# Altium PCB bluetooth_candle.PcbDoc
Units mil, origin at the board's own origin, x right, y up, seen from the top; angles counter-clockwise.
Board outline 1700 x 1700 mil, 2 copper layers (Top Layer, Bottom Layer); 29 components, 46 nets, 119 pads, 21 vias.
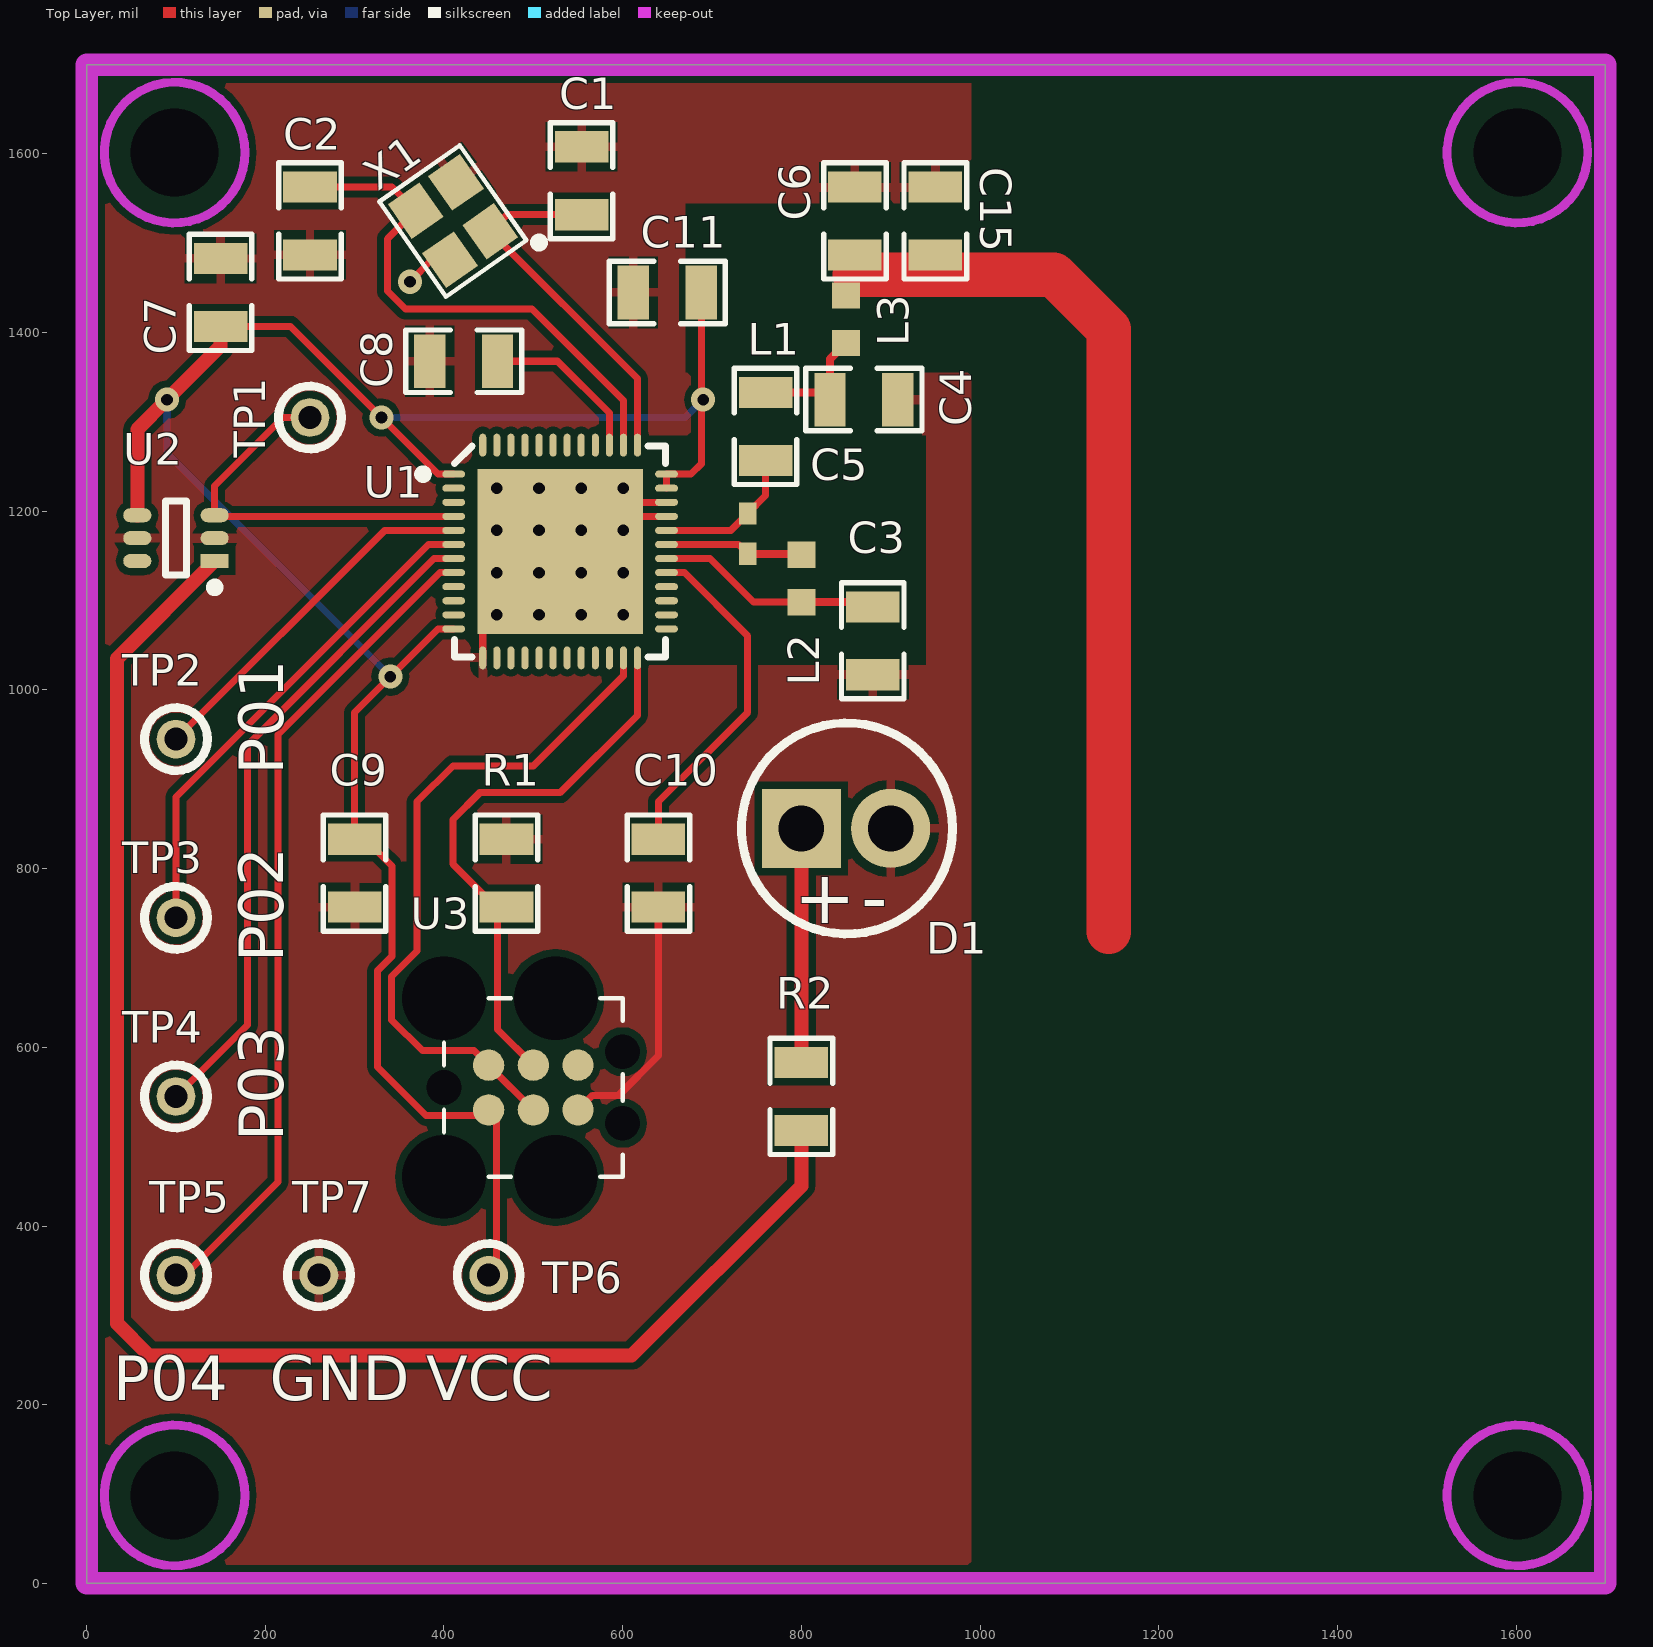
[diagram p0: Top Layer view]
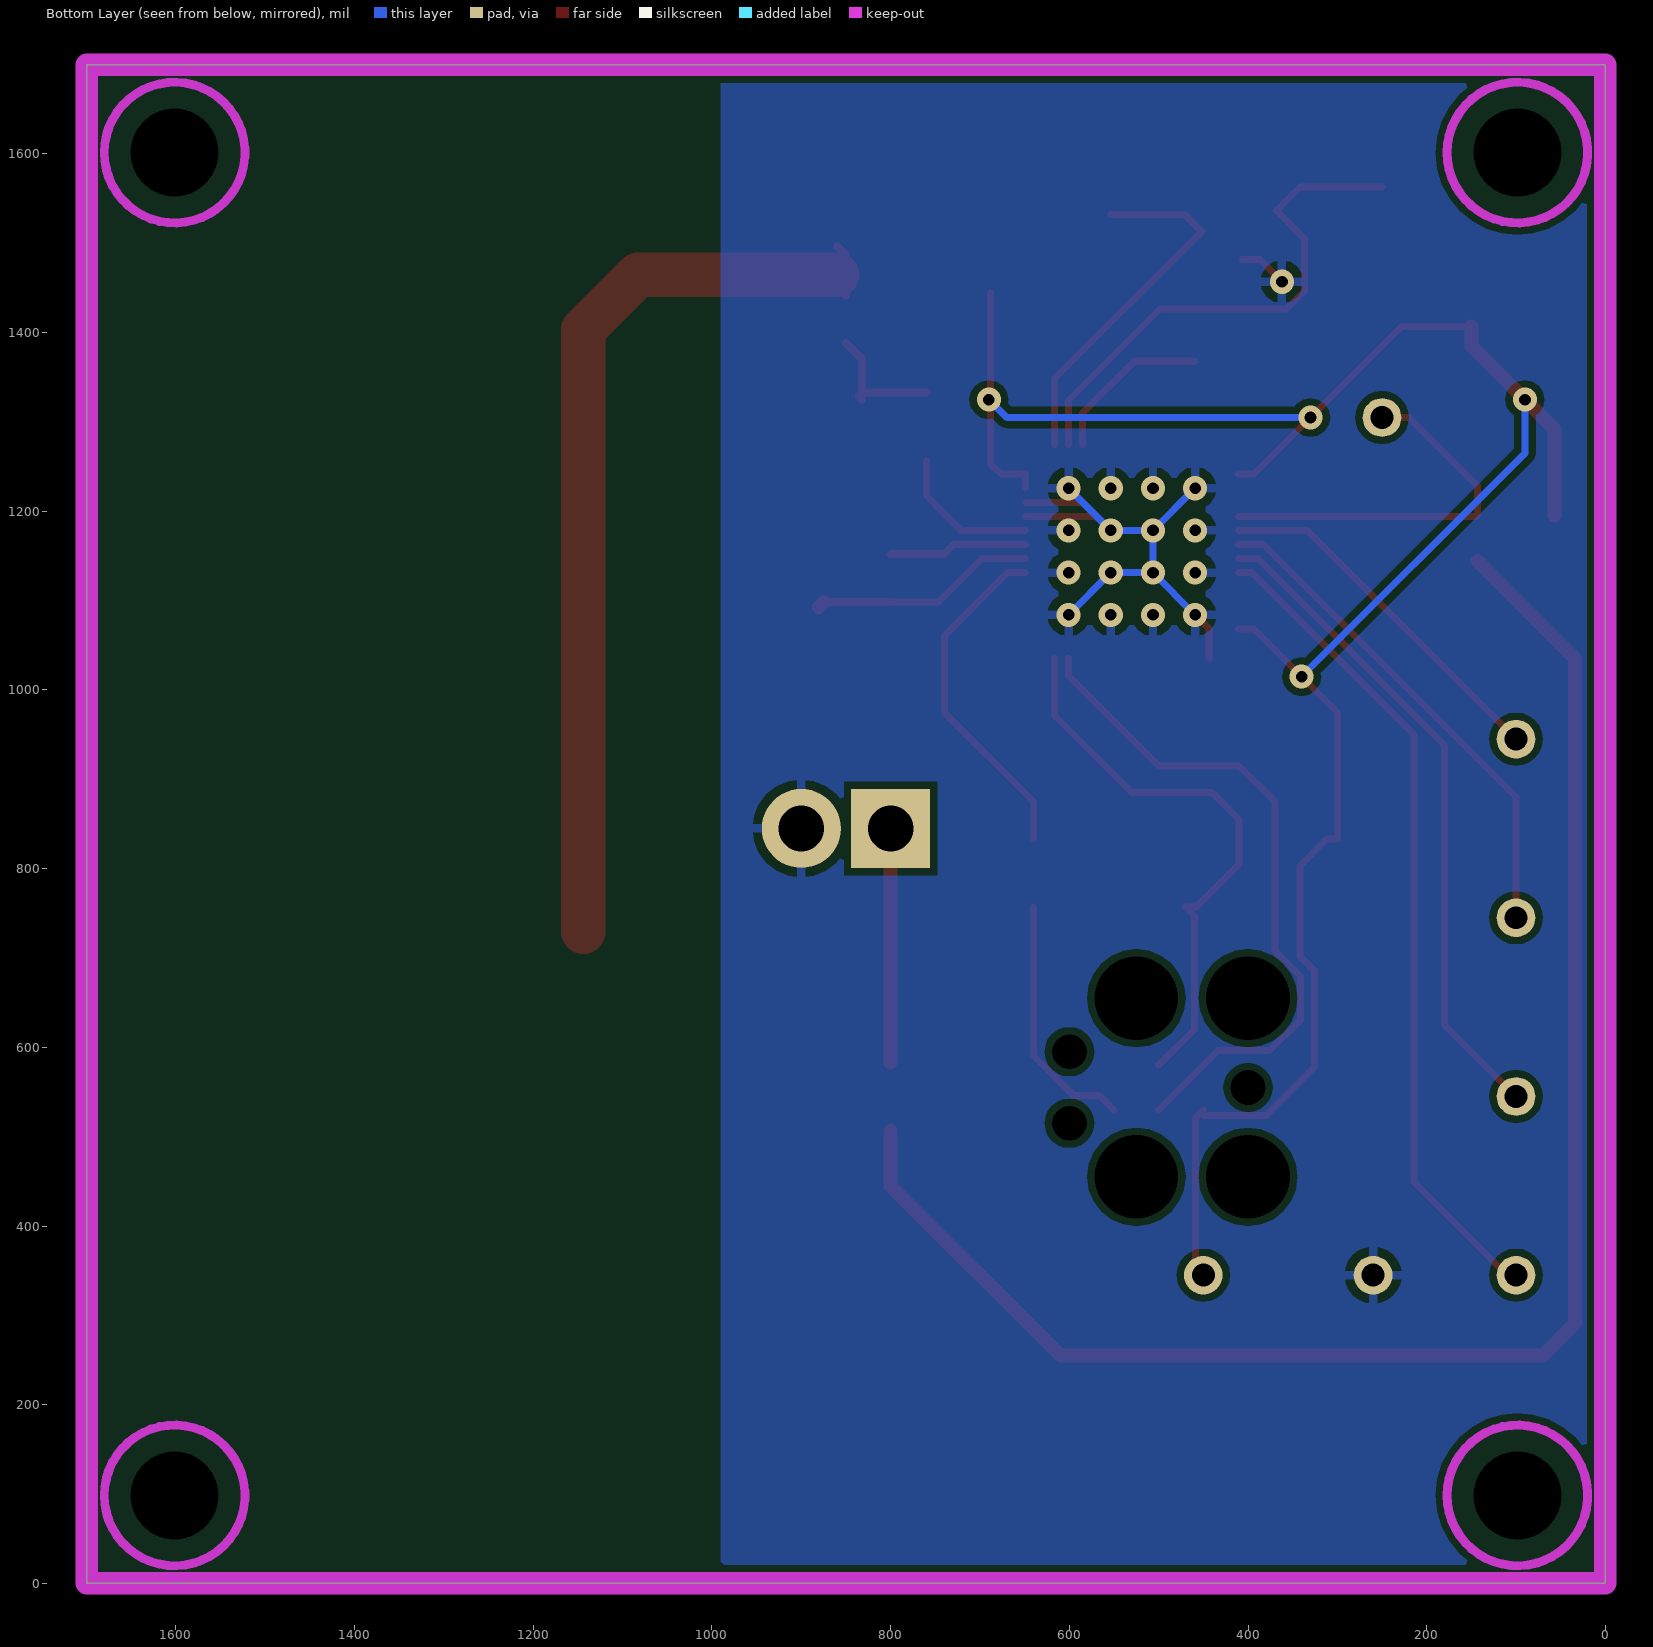
[diagram p1: Bottom Layer view, seen from below]
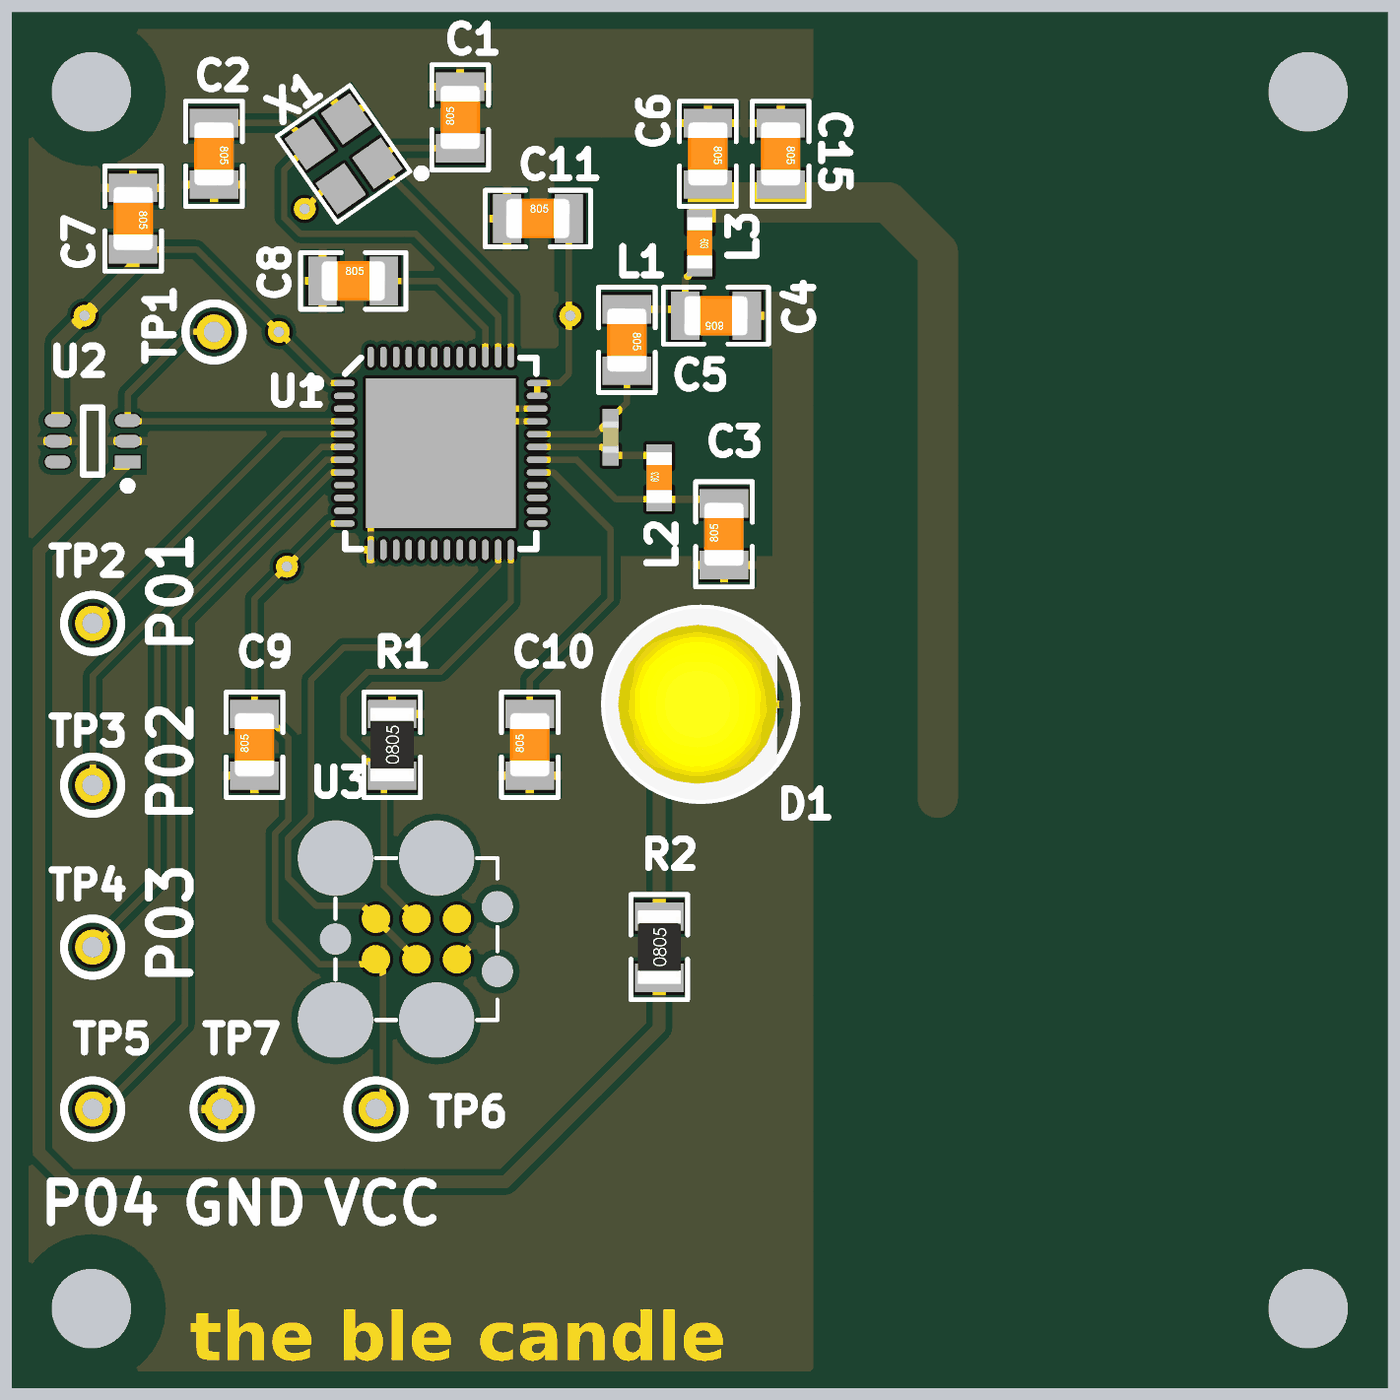
[diagram p2: 3D render of the assembled board from above, using the file's embedded part models]

## Layer stack, top to bottom
Top Solder: solder mask 0.4, Solder Resist, Dk 3.5
Top Layer: signal copper 1.4
Dielectric 1: dielectric 12.6, FR-4, Dk 4.8
Bottom Layer: signal copper 1.4
Bottom Solder: solder mask 0.4, Solder Resist, Dk 3.5

## Board outline
0,1700 0,0 1700,0 1700,1700

## Design rules (kind name [scope] priority, off if disabled: settings)
Clearance [All] p1: gap=7.87
MinimumSolderMaskSliver [All] p1: minsoldermaskwidth=0
PolygonConnect [All] p1: connectstyle=Relief reliefconductorwidth=10 reliefentries=4 polygonreliefangle="90 Angle" airgapwidth=10
RoutingVias [All] p1: holewidth=28 width=50 viastyle="Through Hole" minholewidth=28 minwidth=50 maxholewidth=28 maxwidth=50
SilkToSilkClearance [All] p1: silktosilkclearance=2
SilkToSolderMaskClearance [IsPad] p1: minsilkscreentomaskgap=0 clearancetoexposedcopper=TRUE
SolderMaskExpansion [All] p1: expansion=4
Width [All] p1: maxlimit=78.74 minlimit=7.87 preferedwidth=7.87
27 further rules are at their usual default settings.

## Components (designator, comment, footprint, x,y, rotation, side; value= is the part's Value field where it differs from the comment)
C1 "VJ0805A120GXJCW1BC" 0805_Capacitor 554,1570 r90 top
C2 "VJ0805A120GXJCW1BC" 0805_Capacitor 250,1525 r270 top
C3 "C2012X7R2A222M085AA" 0805_Capacitor 880,1055 r90 top
C4 "251R15S0R8DV4E" 0805_Capacitor 870,1325 r180 top
C5 "VJ0805A2R2BXAPW1BC" 0805_Capacitor 760,1295 r270 top
C6 "VJ0805A1R5BXJPW1BC" 0805_Capacitor 860,1525 r270 top
C7 "C2012X5R0J475K125AA" 0805_Capacitor 150,1445 r270 top
C8 "C2012X7R1H104K085AA" 0805_Capacitor 422,1368 r0 top
C9 "C2012C0G1H102J060AA" 0805_Capacitor 300,795 r90 top
C10 "C2012X7R1H473K" 0805_Capacitor 640,795 r90 top
C11 "C2012X7R1H104K085AA" 0805_Capacitor 650,1445 r0 top
C15 "VJ0805A1R2BXJPW1BC" 0805_Capacitor 950,1525 r270 top
D1 "C566C-AFS-CU0W0252" Radial_LED 800,845 r0 top locked
L1 "ILC0402ER4N7S" 0402_Capacitor 740,1175 r270 top
L2 "L-14C10NJV4T" 0603_Capacitor 800,1125 r270 top
L3 "L-14C3N3SV4T" 0603_Capacitor 850,1415 r90 top
R1 "ERJ-6GEYJ103V" 0805_RESISTOR 470,795 r90 top
R2 "ERJ-P06J820V" 0805_RESISTOR 800,545 r90 top
TP1 "Test Point" Test_Point 250,1305 r0 top
TP2 "Test Point" Test_Point 100,945 r0 top
TP3 "Test Point" Test_Point 100,745 r0 top
TP4 "Test Point" Test_Point 100,545 r0 top
TP5 "Test Point" Test_Point 100,345 r0 top
TP6 "Test Point" Test_Point 450,345 r0 top
TP7 "Test Point" Test_Point 260,345 r0 top
U1 "nRF51822" NRF51822-QFN 530,1155 r0 top
U2 "216-0011-01" SiP32431 100,1170 r180 top
U3 "TC2030" TC2030 400,555 r0 top
X1 "FA-20H 16.0000MF12V-AJ3" XTAL-2x2.5mm 410,1525 r125 top

## Footprints (in the part's own frame and the unit in brackets; to place one, negate y for a bottom-side part, rotate by r counter-clockwise, add the part's x,y. Pads: shape width x height; smd on the part's side, far side on the other; paste and mask are expansions set on the pad)
0402_Capacitor [mil]
  rect 25x20 smd: 1(-22.64,0) 2(22.64,0)
  body extent -20,-10 20,10, height 20
0603_Capacitor [mm]
  rect 0.75x0.8 smd: 1(-0.675,0) 2(0.675,0)
  body extent -0.8,-0.4 0.8,0.4, height 0.31
0805_Capacitor [mil]
  rect 35x60 smd: 1(-38,0) 2(38,0)
  silkscreen extent -65,-35 65,35, body extent -39,-25 39,25, height 31
0805_RESISTOR [mil]
  rect 35x60 smd: 1(-38,0) 2(38,0)
  silkscreen extent -65,-35 65,35, body extent -45,-27 45,27, height 30
NRF51822-QFN [mm]
  oval 0.65x0.2 smd: 1(-3.025,2.2) 2(-3.025,1.8) 3(-3.025,1.4) 4(-3.025,1) 5(-3.025,0.6) 6(-3.025,0.2) 7(-3.025,-0.2) 8(-3.025,-0.6) 9(-3.025,-1) 10(-3.025,-1.4) 11(-3.025,-1.8) 12(-3.025,-2.2) 25(3.025,-2.2) 26(3.025,-1.8) 27(3.025,-1.4) 28(3.025,-1) 29(3.025,-0.6) 30(3.025,-0.2) 31(3.025,0.2) 32(3.025,0.6) 33(3.025,1) 34(3.025,1.4) 35(3.025,1.8) 36(3.025,2.2)
  oval 0.2x0.65 smd: 13(-2.2,-3.025) 14(-1.8,-3.025) 15(-1.4,-3.025) 16(-1,-3.025) 17(-0.6,-3.025) 18(-0.2,-3.025) 19(0.2,-3.025) 20(0.6,-3.025) 21(1,-3.025) 22(1.4,-3.025) 23(1.8,-3.025) 24(2.2,-3.025) 37(2.2,3.025) 38(1.8,3.025) 39(1.4,3.025) 40(1,3.025) 41(0.6,3.025) 42(0.2,3.025) 43(-0.2,3.025) 44(-0.6,3.025) 45(-1,3.025) 46(-1.4,3.025) 47(-1.8,3.025) 48(-2.2,3.025)
  rect 4.7x4.7 smd: 49(0,0)
  silkscreen extent -4.02,-3 3,3, body extent -3,-3 3,3, height 0.9
Radial_LED [mm]
  rect 2.25x2.25 hole 1.3: 1(0,0)
  round 2.25 hole 1.3: 2(2.54,0)
  silkscreen extent -1.7,-3 4.3,3, body extent -1.71,-3.01 3.71,3.01, height 8.61
SiP32431 [mm] "TSOP, 6-Leads, Body 2.00x1.25mm, Pitch 0.65mm, IPC Medium Density"
  rect 0.8x0.4 smd mask+0.051: 1(-1.1,0.65)
  oval 0.8x0.4 smd mask+0.051: 2(-1.1,0) 3(-1.1,-0.65) 4(1.1,-0.65) 5(1.1,0) 6(1.1,0.65)
  silkscreen extent -1.23,-1.05 0.3,1.52, body extent -0.7,-1.05 0.7,1.05, height 1.1
TC2030 [mil] "Debug Plug"
  round 35 smd paste-3937.01: 1(50,-25) 2(50,25) 3(100,-25) 4(100,25) 5(150,-25) 6(150,25)
  round 0 hole 93.5 unplated paste-100 mask-100: ""(0,-100) ""(0,100) ""(125,-100) ""(125,100)
  round 0 hole 39.02 unplated paste-100 mask-100: ""(0,0) ""(200,-40) ""(200,40)
  silkscreen extent 0,-100 200,100
Test_Point [mm]
  round 1.1 hole 0.65: 1(0,0)
  silkscreen extent -0.89,-0.9 0.9,0.9
XTAL-2x2.5mm [mm] "(FA-20H 16.0000MF12V-AJ3 or similar)"
  rect 1.2x1.1 smd: 1(-0.85,-0.7) 2(0.85,-0.7) 3(0.85,0.7) 4(-0.85,0.7)
  silkscreen extent -2.03,-1.78 1.65,1.4, body extent -1.25,-1 1.25,1, height 0.55

## Part data
C1 C2: "CAPACITOR, CERAMIC, 12pF, 0805, 16V, +/-2%"
C3: "CAPACITOR, CERAMIC, 2200pF, 0805, 100V, +/-20%"
C4: "CAPACITOR, CERAMIC, 0.8pF, 0805, 250V, +/-0.5pF"
C5: "CAPACITOR, CERAMIC, 2.2pF, 0805, 50V, +/-0.1pF"
C6: "CAPACITOR, CERAMIC, 1.5pF, 0805, 16V, +/-0.1pF"
C7: "CAPACITOR CERAMIC, 4.7uF, 0805, 6.3V, +/-10%"
C8 C11: "CAPACITOR, CERAMIC, 0.1uF, 0805, 50V, +/-10%"
C9: "CAPACITOR, CERAMIC, 1000pF, 0805, 50V, +/-5%"
C10: "CAPACITOR, CERAMIC, .047uF, 0805, 50V, +/-10%"
C15: "CAPACITOR, CERAMIC, 1.2pF, 0805, 16V, +/-0.1pF"
D1: "LED 5MM OVAL AMBER 591NM"
L1: "INDUCTOR 4.7NH +/- 0.1NH SMD"
L2: "INDUCTOR 10nH +/- 5% SMD"
L3: "INDUCTOR 3.3nH +/- 0.3NH SMD"
R1: "RESISTOR, 10k, 0805, 5%"
R2: "RESISTOR, 82R, 0805, 5%"
U1: "IC BLUETOOTH MCU 32BIT"
U2: library part SiP32431, "IC LOAD SWITCH SC70-6"
U3: "TC2030 PROGRAMMING FOOTPRINT"
X1: "CRYSTAL 16MHz 10PPM 8.0pF"

## Free pads (board coordinates)
  round 0 hole 98.43 unplated: 0(98.43,98.43) 0(98.43,1601.57) 0(1601.57,98.43) 0(1601.57,1601.57)

## Via types
v1: diameter 27, hole 13, Top Layer to Bottom Layer, 16 vias
v2: diameter 27, hole 13, Top Layer to Bottom Layer, tented bottom, 5 vias

## Nets (pads, with @x,y where several pads share a name; then routed paths per layer and width w, separated by ;. In a path a pad name is that pad's centre, name@x,y a point inside that pad or via, vN(x,y) a via of type N, cw(c..) or ccw(c..) an arc to the next point about the centre after c; other vN are vias at no path point)
ANT: C6.2 C15.2 L3.2 | length 1042.9
  Top Layer w9.02: L3.2 850,1487 C6.2@860,1497
  Top Layer w50: 860,1465 1082.61,1465 1144,1403.61 1144,729.65
ANT1: L1.2 L2.1 U1.31 | length 155.6
  Top Layer w7.87: U1.31 729.49,1162.87 L1.2
  Top Layer w9.02: L1.2 799.21,1152.36 L2.1
ANT2: C5.2 L1.1 U1.32 | length 166.4
  Top Layer w7.87: U1.32 720.98,1178.62 L1.1 760,1217.64 C5.2
DEC1: C8.2 U1.39 | length 185
  Top Layer w7.87: C8.2 527,1368 585.12,1309.88 U1.39
DEC2: C10.2 U1.29 | length 389.2
  Top Layer w7.87: C10.2 640,875 740,975 740,1060.47 669.09,1131.38 U1.29
GND: C1.2 C2.2 C3.1 C4.1 C6.1 C7.1 C8.1 C9.1 C10.1 C11.1 C15.1 D1.2 R1.2 TP7.1 U1.13 U1.33 U1.34 U1.49 U2.2 U2.5 U3.5 X1.2 X1.4 | length 988.3
  Top Layer w7.87: v2(362,1457) 386.78,1481.78 X1.4 ; U1.13 443.39,1068.39 v1(459.13,1084.13) ; U3.5 566.32,546.32 595.61,546.32 640,590.71 C10.1 ; v1(553.62,1178.62) U1.49@569.37,1194.37 ; U1.33 U1.49@569.37,1194.37 ; U1.34 585.12,1210.12 U1.49@569.37,1194.37
  Bottom Layer w7.87: v1(459.13,1084.13) v1(506.38,1131.38) ; v1(459.13,1225.87) v1(506.38,1178.62) ; v1(600.87,1084.13) v1(553.62,1131.38) v1(506.38,1131.38) ; v1(600.87,1225.87) v1(553.62,1178.62) v1(506.38,1178.62) ; v1(506.38,1131.38) v1(506.38,1178.62)
  other v1: 506.38,1084.13 553.62,1084.13 459.13,1131.38 600.87,1131.38 459.13,1178.62 600.87,1178.62 506.38,1225.87 553.62,1225.87
NetC4_2: C4.2 C5.1 L3.1 | length 148.5
  Top Layer w9.02: C5.1 C4.2@832,1333 ; C4.2@836,1329 C4.2 C4.2@832,1333 ; L3.1 832,1370.43 C4.2@832,1333
NetD1_1: D1.1 R2.2 | length 262
  Top Layer w15.75: R2.2 D1.1
NetR2_1: R2.1 U2.1 | length 1820.4
  Top Layer w15.75: U2.1 33.9,1035 33.9,291.1 70,255 610,255 800,445 R2.1
P0.00: TP1.1 U1.4 U2.3 | length 439.3
  Top Layer w7.87: TP1.1 220,1305 143.31,1228.31 U2.3 144.53,1194.37 U1.4
P0.01: TP2.1 U1.5 | length 407.7
  Top Layer w7.87: TP2.1 333.62,1178.62 U1.5
P0.02: TP3.1 U1.6 | length 563.3
  Top Layer w7.87: TP3.1 100,880.4 382.48,1162.87 U1.6
P0.03: TP4.1 U1.7 | length 743.7
  Top Layer w7.87: TP4.1 180,625 180,938.13 389,1147.13 U1.7
P0.04: TP5.1 U1.8 | length 930
  Top Layer w7.87: TP5.1 110,345 214.25,449.25 214.25,950.11 395.52,1131.38 U1.8
P0.05: U1.9
P0.06: U1.10
P0.07: U1.11
P0.08: U1.14
P0.09: U1.15
P0.10: U1.16
P0.11: U1.17
P0.12: U1.18
P0.13: U1.19
P0.14: U1.20
P0.15: U1.21
P0.16: U1.22
P0.17: U1.25
P0.18: U1.26
P0.19: U1.27
P0.20: U1.28
P0.21: U1.40
P0.22: U1.41
P0.23: U1.42
P0.24: U1.43
P0.25: U1.44
P0.28: U1.47
P0.29: U1.48
P0.30: U1.3
SWCLK: R1.1 U1.24 U3.4 | length 646.8
  Top Layer w7.87: U3.4 460,620 460,747 R1.1 458,757 410,805 410,855 440,885 530,885 616.61,971.61 U1.24
SWDIO: U1.23 U3.2 U3.3 | length 765.6
  Top Layer w7.87: U3.3 U3.2 433.56,596.44 375.74,596.44 341.44,630.74 341.44,679.26 370,707.82 370,875 410,915 499.95,915 600.87,1015.91 U1.23
VCC_NRF: C7.2 C9.2 C11.2 TP6.1 U1.1 U1.12 U1.35 U1.36 U2.4 U3.1 | length 2535.5
  Top Layer w7.87: C7.2 228,1407 v2(330,1305) 393.39,1241.61 U1.1 ; U1.12 393.39,1068.39 v2(340,1015) 300,975 C9.2 312,833 341.81,803.19 341.81,701.9 325.69,685.78 325.69,577.99 380,523.68 450,523.68 U3.1 458.56,521.44 458.56,353.56 TP6.1 ; U1.35 U1.36 676.61,1241.61 688,1253 C11.2
  Top Layer w15.75: U2.4 56.69,1291.69 v2(90,1325) 150,1385 C7.2
  Bottom Layer w7.87: v2(90,1325) 90,1265 v2(340,1015) ; v2(330,1305) 670,1305 v2(690,1325)
VDD_PA: C3.2 L2.2 U1.30 | length 253.3
  Top Layer w7.87: U1.30 697.87,1147.13 746.57,1098.43 L2.2
  Top Layer w9.02: L2.2 C3.2@874.57,1098.43
  Top Layer w15.75: C3.2@874.57,1098.43 C3.2
XC1: C1.1 U1.37 X1.1 | length 417.5
  Top Layer w7.87: C1.1 470.37,1532 X1.1 616.61,1348.55 U1.37
XC2: C2.1 U1.38 X1.3 | length 597.1
  Top Layer w7.87: C2.1 341.84,1563 X1.3 336.69,1505.06 336.69,1446.52 356.72,1426.49 498.38,1426.49 600.87,1324 U1.38
XL1: U1.45
XL2: U1.46
pads on no net: U1.2 U2.6 U3. U3.6

## Polygon pours and split planes (outlines as drawn)
GND on Bottom Layer "Top Layer-No Net" (solid, remove dead copper, pour order 11): 0,1700 990,1700 990,0 0,0
GND on Top Layer "Top Layer-No Net" (solid, remove dead copper, pour order 10): 0,1700 990,1700 990,0 0,0

## Keep-outs
Keep-Out Layer:
  circle w10: c1601.57,1601.57 r78.74
  circle w10: c1601.57,98.43 r78.74
  circle w10: c98.43,98.43 r78.74
  circle w10: c98.43,1601.57 r78.74
  lines w25: 0,0 0,1700 1700,1700 1700,0 0,0

## Other copper
Top Layer:
  pour cut-out: 630,1284.97 940,1284.97 940,1027.97 630,1027.97
  pour cut-out: 670,1545 993.06,1545 993.06,1355 670,1355

## Silkscreen, mask and mechanical layers (free items; w line width, h text height)
Top Overlay:
  text "P01" at 220,905 h50 r90
  text "P02" at 220,695 h50 r90
  text "P03" at 220,495 h50 r90
  text "P04" at 30,205 h50
  text "GND" at 205,205 h50
  text "VCC" at 380,205 h50
Top Solder:
  text "the ble candle" at 220,35 h118.11

## Text inside footprints (layer, text, board x,y; h text height)
D1: Top Overlay "+" at 792.13,738.7 h60; Top Overlay "-" at 866.93,738.7 h60